# EAGLE board VisualightMicroDIY_01 (EAGLE 6.2)
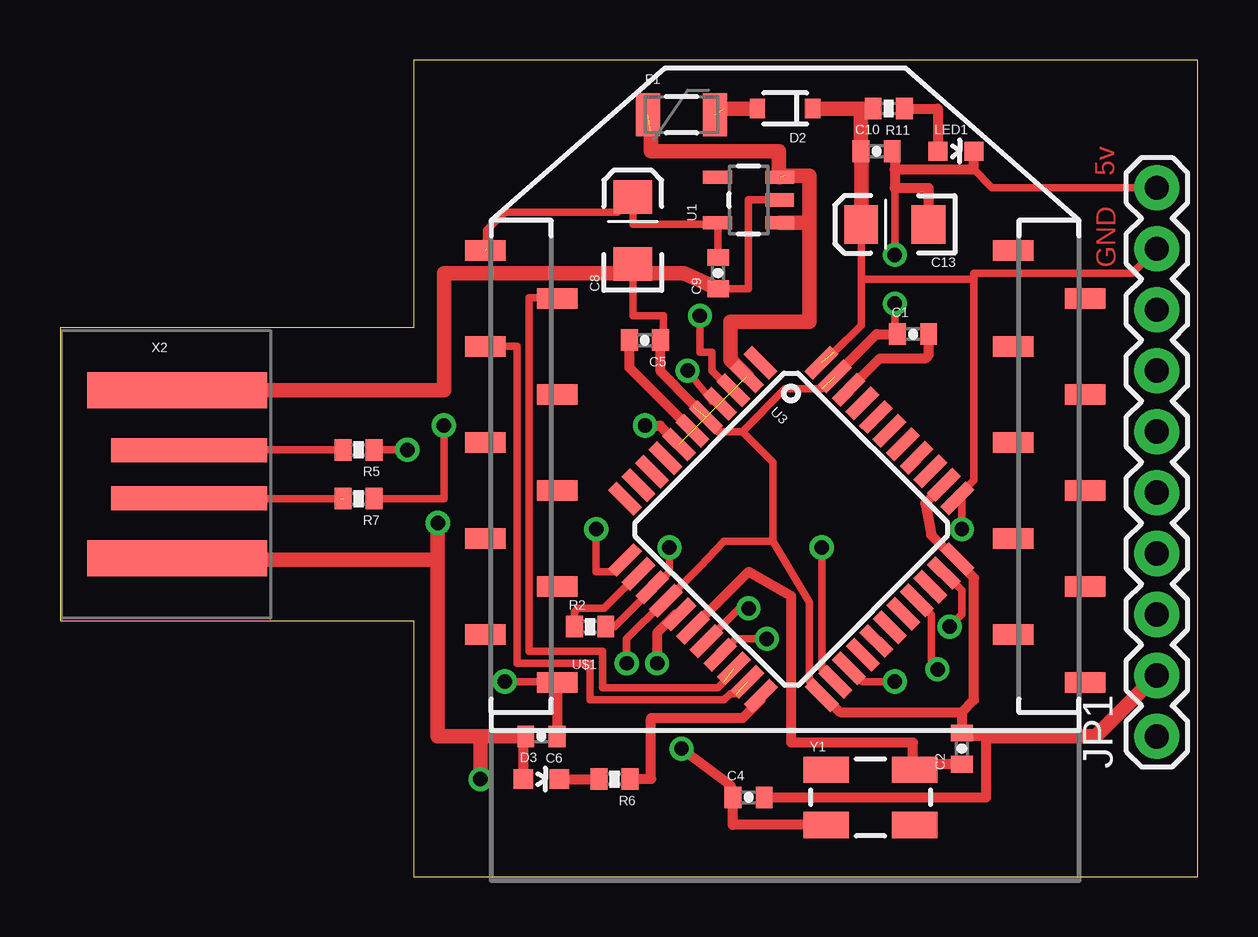
[diagram p0: board, top side]
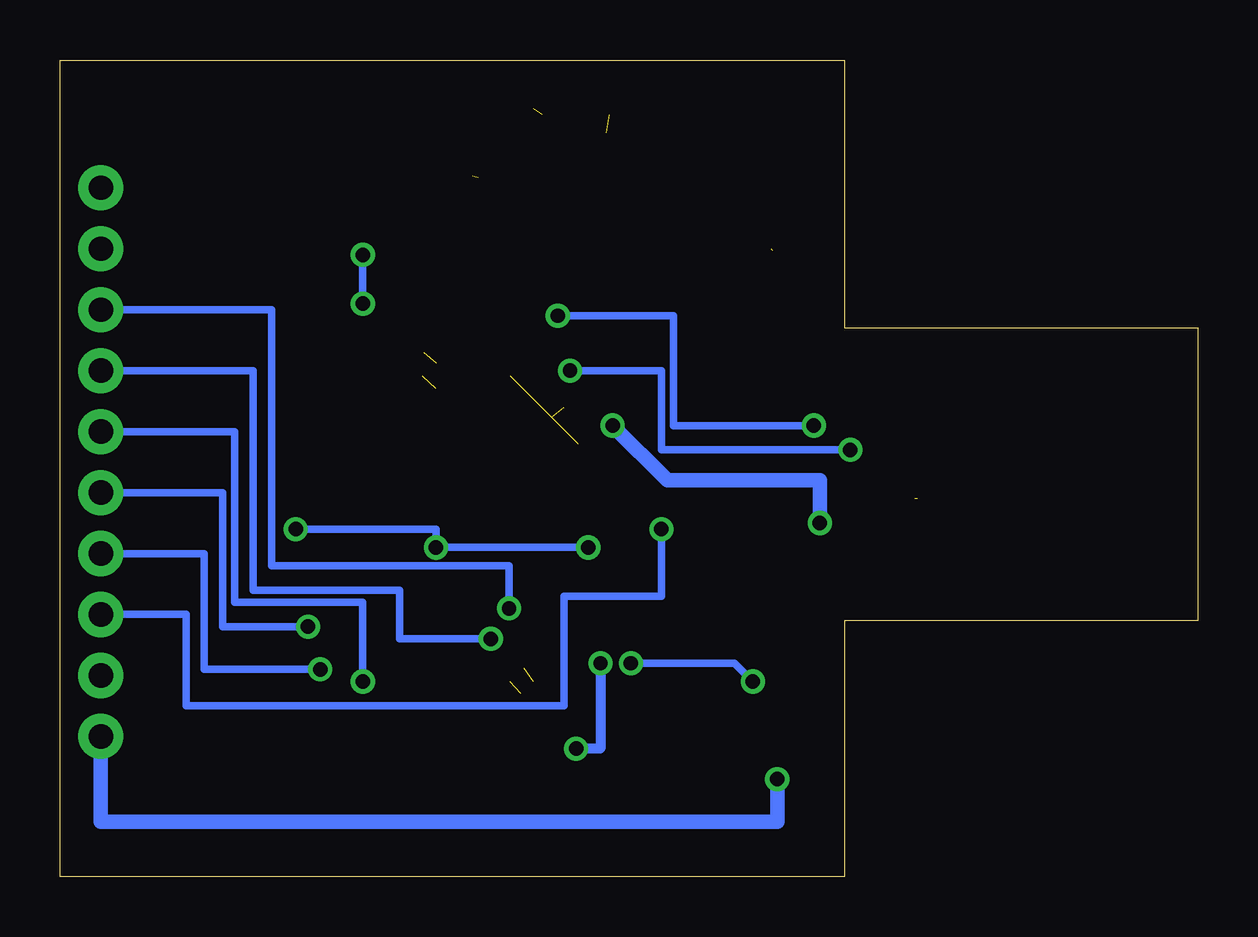
[diagram p1: board, bottom side, seen from below]

Size 47.42 x 34.03 mm. Coordinates in mm from the lower left corner, seen from the top.
Outline: 14.73,0 47.42,0 47.42,34.03 14.73,34.03 14.73,22.86 0,22.86 0,10.67 14.73,10.67 14.73,0
Copper layers (1*16): Top 0.035mm / dielectric 1.5mm / Bottom 0.035mm
Design rules: minimum track width 10mil, minimum drill 24mil, track to track 8mil, track to pad 8mil, pad to pad 8mil, via to via 8mil, smd to smd 8mil, copper to edge 40mil, drill to drill 8mil, minimum pad ring 10mil, minimum via ring 8mil, stop-mask expansion 4mil, vias tented up to drill 0mil, thermal gap 10mil
Net classes: 0 default: width 0.003 mm, drill 0.254 mm, clearance 0.152 mm

## Footprints (pad centres in the part's own frame; a part is rotated, then mirrored left to right if it is on the bottom)
0402-CAP = smd 0.7 x 0.9: 1 -0.65,0; 2 0.65,0
EIA3216 = smd 1.4 x 1.6: A 1.4,0; C -1.4,0
SOD-323 = smd 0.63 x 0.83: 1 -1.15,0; 2 1.15,0
LED-0603 = smd 0.8 x 0.8: A 0,-0.75; C 0,0.75
PTC-1206 = smd 1 x 1.8: 1 -1.4,0; 2 1.4,0
1X10 = drill 1.016 pad 1.88: 1 0,0; 2 2.54,0; 3 5.08,0; 4 7.62,0; 5 10.16,0; 6 12.7,0; 7 15.24,0; 8 17.78,0; 9 20.32,0; 10 22.86,0
0402-RES = smd 0.7 x 0.9: 1 -0.65,0; 2 0.65,0
SOT23-5 = smd 0.55 x 1.2: 1 -0.95,-1.3; 2 0,-1.3; 3 0.95,-1.3; 4 0.95,1.3; 5 -0.95,1.3
SPARKFUN-DIGITALIC_TQFP44 = smd 1.5 x 0.5: 1 -5.8,4; 2 -5.8,3.2; 3 -5.8,2.4; 4 -5.8,1.6; 5 -5.8,0.8; 6 -5.8,0; 7 -5.8,-0.8; 8 -5.8,-1.6; 9 -5.8,-2.4; 10 -5.8,-3.2; 11 -5.8,-4; 23 5.8,-4; 24 5.8,-3.2; 25 5.8,-2.4; 26 5.8,-1.6; 27 5.8,-0.8; 28 5.8,0; 29 5.8,0.8; 30 5.8,1.6; 31 5.8,2.4; 32 5.8,3.2; 33 5.8,4 | smd 0.5 x 1.5: 12 -4,-5.8; 13 -3.2,-5.8; 14 -2.4,-5.8; 15 -1.6,-5.8; 16 -0.8,-5.8; 17 0,-5.8; 18 0.8,-5.8; 19 1.6,-5.8; 20 2.4,-5.8; 21 3.2,-5.8; 22 4,-5.8; 34 4,5.8; 35 3.2,5.8; 36 2.4,5.8; 37 1.6,5.8; 38 0.8,5.8; 39 0,5.8; 40 -0.8,5.8; 41 -1.6,5.8; 42 -2.4,5.8; 43 -3.2,5.8; 44 -4,5.8
XBEE-SMD = smd 1.7 x 0.85: 1 -12.5,20; 2 -9.5,18; 3 -12.5,16; 4 -9.5,14; 5 -12.5,12; 6 -9.5,10; 7 -12.5,8; 8 -9.5,6; 9 -12.5,4; 10 -9.5,2; 11 12.5,2; 12 9.5,4; 13 12.5,6; 14 9.5,8; 15 12.5,10; 16 9.5,12; 17 12.5,14; 18 9.5,16; 19 12.5,18; 20 9.5,20
USB-A-PCB = smd 7.5 x 1.5: 5V -0.2,-3.5; GND -0.2,3.5 | smd 6.5 x 1: USB_M 0.3,-1; USB_P 0.3,1
CRYSTAL-SMD-5X3 = smd 1.9 x 1.1: 1 -1.85,-1.15; 2 1.85,-1.15; 3 1.85,1.15; 4 -1.85,1.15

## Placement (x,y rotation side)
C1  0.1uF  [0402-CAP]  35.56,22.61 0 top
C2  22pF  [0402-CAP]  37.59,5.33 90 top
C4  22pF  [0402-CAP]  28.7,3.3 0 top
C5  1uF  [0402-CAP]  24.38,22.35 180 top
C6  1uF  [0402-CAP]  20.07,5.84 180 top
C8  10uF  [EIA3216]  23.88,26.92 90 top
C9  0.1uF  [0402-CAP]  27.43,25.15 90 top
C10  1uF  [0402-CAP]  34.04,30.23 0 top
C13  10uF  [EIA3216]  34.8,27.18 180 top
D2  [SOD-323]  30.23,32 180 top
D3  Green  [LED-0603]  20.07,4.06 270 top
F1  500mA  [PTC-1206]  25.91,31.75 0 top
JP1  M10"  [1X10]  45.72,5.84 90 top
LED1  Red  [LED-0603]  37.34,30.23 270 top
R2  10K  [0402-RES]  22.1,10.41 0 top
R5  22  [0402-RES]  12.45,17.78 180 top
R6  330  [0402-RES]  23.11,4.06 180 top
R7  22  [0402-RES]  12.45,15.75 180 top
R11  1K  [0402-RES]  34.54,32 180 top
U1  MIC5219 3.3V  [SOT23-5]  28.7,28.19 90 top
U3  ATMEGA32U4  [SPARKFUN-DIGITALIC_TQFP44]  30.48,14.48 315.1 top
U$1  XBEE-1B3  [XBEE-SMD]  30.23,6.1 0 top
X2  USBPCB  [USB-A-PCB]  5.08,16.76 0 top
Y1  16MHz  [CRYSTAL-SMD-5X3]  33.78,3.3 0 top

## Library data of the parts
C1 C2 C4-C6 C8-C10 C13 D2 D3 F1 LED1 R2 R5-R7 R11 Y1 = SparkFun
JP1 X2 = SparkFun-Connectors
U1 = SparkFun-PowerIC; PROD_ID: VREG-09872
U3 = SparkFun-DigitalIC
U$1 = SparkFun-RF; PROD_ID: CONN-09042

## Nets
+3V3_OUT: C8.A C9.2 U1.5 U$1.1
A0: U3.36
A1: U3.37
A2: U3.38
A3: U3.39
A4: U3.40
A5: U3.41
AREF: C1.2 U3.42
D2: JP1.7 U3.19
D3: JP1.8 U3.18
D4: JP1.6 U3.25
D5: U3.31
D6: U3.27
D7: U3.1
D8: U3.28
D9: U3.29
D10: JP1.4 U3.30
D11: JP1.3 U3.12
D12: U3.26
D13: JP1.5 U3.32
D17: U3.8
D+: R5.1 U3.4
D-: R7.1 U3.3
GND [vcc]: C1.1 C2.2 C4.2 C5.1 C6.1 C8.C C9.1 C10.2 C13.C JP1.2 JP1.10 LED1.C U1.2 U3.5 U3.15 U3.23 U3.33 U3.35 U3.43 U$1.10 X2.GND
MISO: U3.11
MOSI: U3.10
N$1: C4.1 U3.16 Y1.1
N$2: C2.1 U3.17 Y1.3
N$4: C5.2 U3.6
N$6: R7.2 X2.USB_M
N$7: D3.C R6.2
N$8: R5.2 X2.USB_P
N$9: D2.2 F1.2
N$38: LED1.A R11.1
RESET: R2.1 U3.13
SCK: U3.9
TXLED: R6.1 U3.22
UVCC: C6.2 D3.A F1.1 JP1.1 U1.1 U1.3 U3.2 U3.7 X2.5V
VCC: C10.1 C13.A D2.1 JP1.9 R2.2 R11.2 U3.14 U3.24 U3.34 U3.44
WIFIDIN: U3.21 U$1.3
WIFIDOUT: U3.20 U$1.2

## Tracks (layer width: path | path; a pad name or v marks a point on that pad's centre or on a via)
+3V3_OUT  (1 unrouted)
  Top 0.305: 17.78,26.16 17.78,26.92 18.54,27.69 23.24,27.69 C8.A 23.88,27.18 27.4,27.18 U1.5 27.43,27.24 C9.2
AREF
  Top 0.406: U3.42 34.18,21.59 36.07,21.59 36.21,21.73 C1.2
D2  (via drill 0.6)
  Top 0.305: v29.46,9.91 28.19,9.91 U3.19
  Bottom 0.305: JP1.7 39.37,21.08 39.37,11.94 33.27,11.94 33.27,9.91 v29.46,9.91
D3  (via drill 0.6)
  Top 0.305: U3.18 28.32,11.18 v28.7,11.18
  Bottom 0.305: v28.7,11.18 28.7,12.95 38.61,12.95 38.61,23.62 JP1.8
D4  (via drill 0.6)
  Top 0.305: U3.25 33.45,8.13 v34.8,8.13
  Bottom 0.305: v34.8,8.13 34.8,11.43 40.13,11.43 40.13,18.54 JP1.6
D10  (via drill 0.6)
  Top 0.305: U3.30 36.32,10.91 36.32,8.89 v36.58,8.64
  Bottom 0.305: v36.58,8.64 41.4,8.64 41.4,13.46 JP1.4
D11  (via drill 0.6)
  Top 0.305: v22.35,14.48 22.35,12.7 23.11,12.7 23.11,12.76 U3.12
  Bottom 0.305: JP1.3 42.16,10.92 42.16,7.11 26.42,7.11 26.42,11.68 22.35,11.68 v22.35,14.48
D13  (via drill 0.6)
  Top 0.305: v37.08,10.41 37.59,10.92 37.59,11.94 36.88,12.65 U3.32
  Bottom 0.305: JP1.5 40.64,16 40.64,10.41 v37.08,10.41
D+  (via drill 0.6)
  Top 0.305: R5.1 v14.48,17.78 | v26.16,21.08 27.18,19.81 27.43,19.81 U3.4
  Bottom 0.305: v14.48,17.78 22.35,17.78 22.35,21.08 v26.16,21.08
D-  (via drill 0.6)
  Top 0.305: R7.1 16,15.75 v16,18.8 | v26.67,23.37 26.67,21.84 27.18,21.84 27.18,21.08 27.94,20.32 U3.3
  Bottom 0.305: v16,18.8 21.84,18.8 21.84,23.37 v26.67,23.37
GND  (via drill 0.6)  (2 unrouted)
  Top 0.305: 26.42,19.67 26.42,19.56 27.43,18.54 28.45,18.54 | 28.45,18.54 30.23,20.32 31.75,20.32 | U$1.10 20.57,8.13 v18.54,8.13 | 29.72,13.97 27.69,13.97 26.67,12.92 U3.15 25.15,11.43 23.62,9.91 v23.62,8.89 | 29.72,13.97 29.72,17.27 28.45,18.54 | 29.72,13.97 31.24,11.43 31.24,8.13 31.77,7.61 U3.23 | v34.8,23.88 34.8,22.61 | 34.8,28.7 v34.8,25.91 | C9.1 28.7,24.5 28.7,28.19 U1.2 | C8.C 23.88,25.15 23.88,23.37 25.15,23.37 25.15,22.35 C5.1 | JP1.10 38.85,28.7 38.09,29.46
  Top 0.406: 26.42,19.67 25.03,21.05 C5.1 | U$1.10 C6.1 | U3.23 31.82,7.55 32.51,6.86 37.59,6.86 | 37.59,6.86 C2.2 37.59,5.84 38.61,5.84 38.61,3.3 C4.2 | 37.59,6.86 38.1,7.37 38.1,12.45 37.41,13.13 U3.33 37.33,13.22 36.32,14.22 36.07,15.55 U3.35 | 34.8,29.46 34.8,30.23 C10.2 | 34.8,29.46 38.09,29.46 LED1.C | 34.8,29.46 34.8,28.7 36.2,28.7 C13.C | C1.1 34.8,22.61 34.04,22.61 32.51,21.08 U3.43
  Top 0.61: X2.GND 16,20.26 16,25.15 23.88,25.15 26.02,25.15 C9.1 | JP1.2 43.18,5.84 38.61,5.84
  Bottom 0.305: v34.8,25.91 v34.8,23.88 | v18.54,8.13 19.3,8.89 v23.62,8.89
N$1  (via drill 0.6)
  Top 0.406: v24.89,8.89 24.89,10.16 25.65,10.92 U3.16 | v25.91,5.33 27.94,3.81 C4.1 28.05,2.15 Y1.1
  Bottom 0.406: v24.89,8.89 24.89,5.33 v25.91,5.33
N$2
  Top 0.406: Y1.3 35.56,4.45 35.56,4.68 | 35.56,4.68 35.56,5.59 30.48,5.59 30.48,11.68 28.7,12.7 26.42,10.41 26.42,10.4 U3.17 | C2.1 35.56,4.68
N$4
  Top 0.406: U3.6 23.73,21.21 C5.2
N$6  (1 unrouted)
  Top 0.305: X2.USB_M 5.4,15.75 11.68,15.75
N$7
  Top 0.406: D3.C R6.2
N$8
  Top 0.305: X2.USB_P 5.4,17.78 R5.2
N$9  (1 unrouted)
  Top 0.61: D2.2 27.69,32
N$10  (via drill 0.6)
  other vias: 37.08,10.41
N$11  (via drill 0.6)
  other vias: 36.58,8.64
N$12  (via drill 0.6)
  other vias: 34.8,8.13
N$13  (via drill 0.6)
  other vias: 29.46,9.91
N$14  (via drill 0.6)
  other vias: 28.7,11.18
N$16  (via drill 0.6)
  other vias: 22.35,14.48
N$17  (via drill 0.6)
  other vias: 17.53,4.06
N$38
  Top 0.406: R11.1 36.59,32 LED1.A
RESET
  Top 0.305: U3.13 22.67,11.18 21.59,11.18 21.45,11.03 R2.1
TXLED
  Top 0.406: U3.22 29.21,7.37 28.45,6.6 24.64,6.6 24.64,4.06 R6.1
UVCC  (via drill 0.6)  (3 unrouted)
  Top 0.406: D3.A 19.32,5.83 19.3,5.84 | v24.38,18.8 25.02,18.8 U3.7
  Top 0.61: 15.75,13.21 5.08,13.21 X2.5V | C6.2 19.3,5.84 17.53,5.84 | 17.53,5.84 15.75,5.84 15.75,13.21 | 15.75,13.21 v15.75,14.73 | U3.2 27.94,21.53 27.94,23.11 31.24,23.11 31.24,27.18 | 31.24,27.18 31.24,29.21 30.23,29.21 | U1.3 29.97,29.14 29.97,30.23 24.64,30.23 24.64,30.99 | v17.53,4.06 17.53,5.84 | U1.1 31.18,27.24 31.24,27.18
  Bottom 0.61: v15.75,14.73 15.75,16.51 22.1,16.51 v24.38,18.8 | JP1.1 45.72,2.29 17.53,2.29 v17.53,4.06
VCC  (via drill 0.6)  (1 unrouted)
  Top 0.305: C13.A 33.4,24.89 | 33.4,24.89 33.4,22.98 32.26,21.84 | 37.59,16 38.1,16.51 38.1,24.89 | 38.1,24.89 33.4,24.89 | v37.59,14.48 37.59,15.75 U3.34 | v31.75,13.72 31.75,8.64 32.26,8.13 U3.24 | v25.4,13.72 25.4,12.7 24.89,12.19 U3.14 | R2.2 23.11,10.41 24.64,11.94 | 38.1,24.89 38.1,25.15 44.7,25.15 JP1.9
  Top 0.406: 24.64,11.94 U3.14 | 37.59,16 U3.34
  Top 0.61: D2.1 R11.2 33.39,32 C10.1 33.4,29.72 C13.A
  Bottom 0.305: v37.59,14.48 31.75,14.48 v31.75,13.72 v25.4,13.72
WIFIDIN  (1 unrouted)
  Top 0.305: U$1.3 19.05,22.1 19.05,8.89 22.1,8.89 22.1,7.37 27.69,7.37 27.94,7.62 28.19,7.62
WIFIDOUT  (1 unrouted)
  Top 0.305: U$1.2 20.69,24.13 19.56,24.13 19.56,9.4 22.61,9.4 22.61,7.87 27.43,7.87 27.69,8.13

## Text on the board
Top: 5v | GND